# EAGLE board tx (EAGLE 9.6.2)
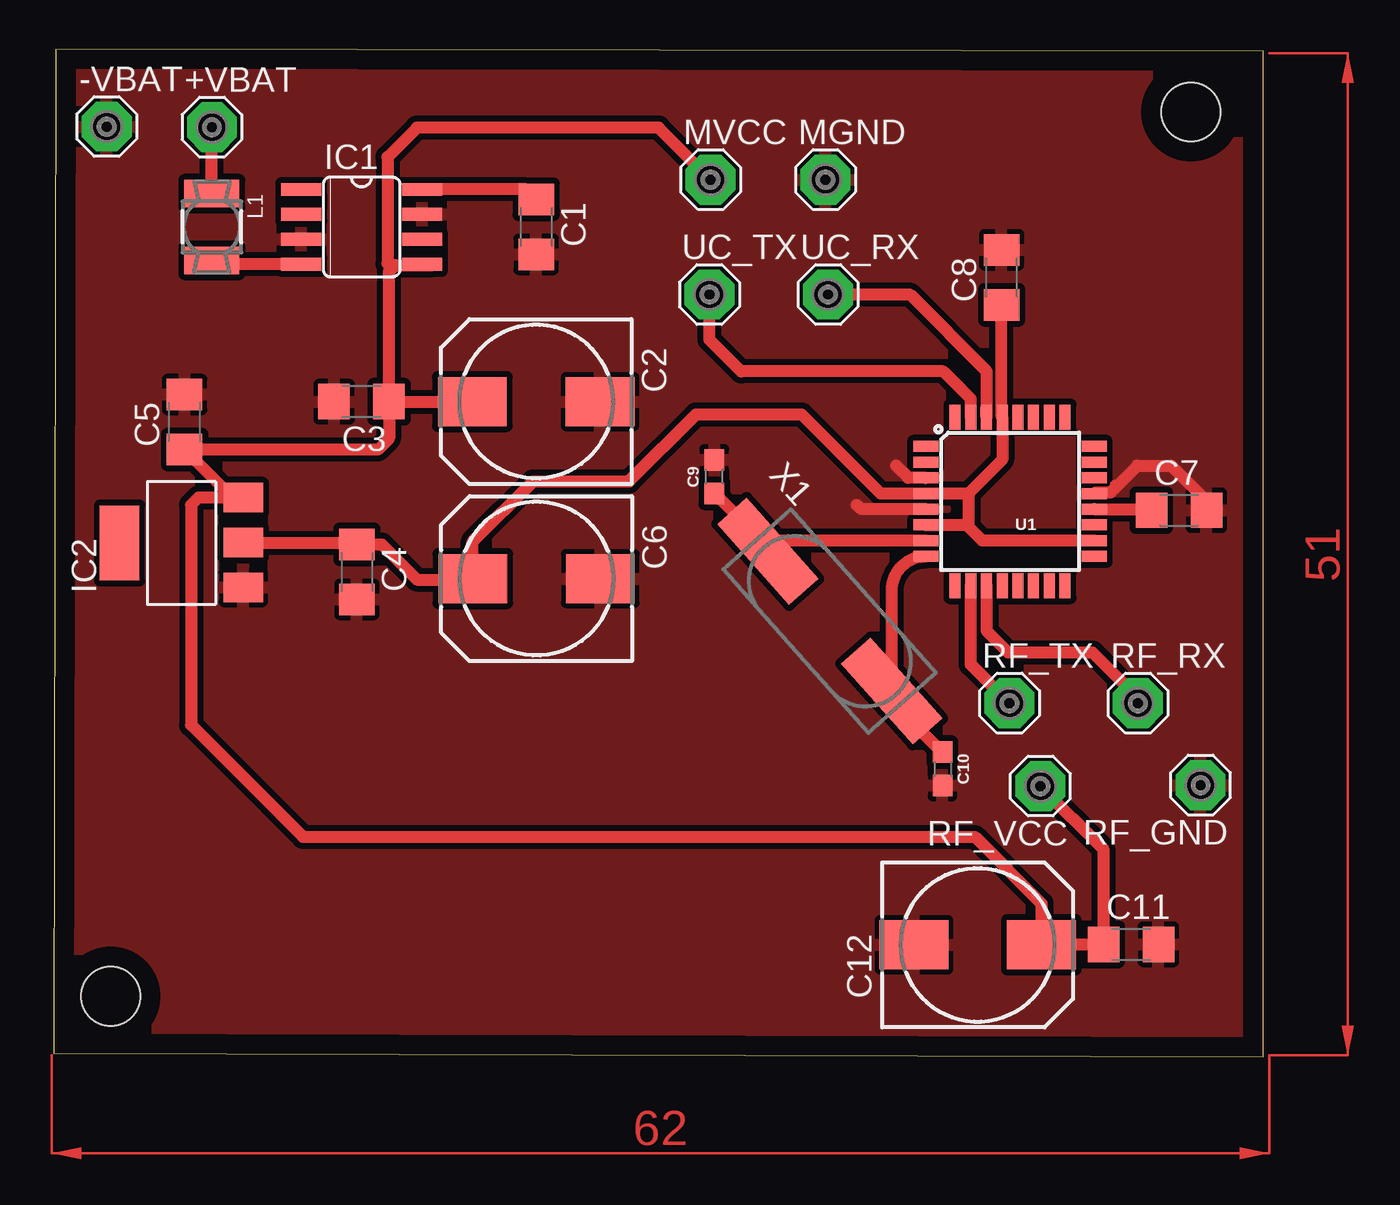
[diagram p0: board, top side]

Size 61.6 x 51.3 mm. Coordinates in mm from the lower left corner, seen from the top.
Outline: 0,0.2 61.6,0 61.6,51.2 0.1,51.3 0,0.2
Copper layers (1*16): Top 0.035mm / dielectric 1.5mm / Bottom 0.035mm
Design rules "default": minimum track width 6mil, minimum drill 0.35mm, track to track 6mil, track to pad 6mil, pad to pad 6mil, via to via 6mil, smd to smd 6mil, copper to edge 40mil, drill to drill 6mil, minimum pad ring 10mil, minimum via ring 8mil, stop-mask expansion 4mil, vias tented up to drill 0mil, thermal gap 10mil
Holes 3 mm at 2.9,3.1 57.9,48.1

## Footprints (pad centres in the part's own frame; a part is rotated, then mirrored left to right if it is on the bottom)
SE14 = drill 1.397 pad 2.54 octagon: MP 0,0
C1206 = smd 1.6 x 1.8: 1 -1.4,0; 2 1.4,0
140CLH-0810 = smd 3.5 x 2.5: + 3.25,0; - -3.25,0
0603 = smd 1.1 x 1: 1 -0.85,0; 2 0.85,0
SO08 = smd 0.66 x 2.032: 1 -1.905,-3.073; 2 -0.635,-3.073; 3 0.635,-3.073; 4 1.905,-3.073; 5 1.905,3.073; 6 0.635,3.073; 7 -0.635,3.073; 8 -1.905,3.073
SOT223 = smd 1.499 x 2.007: 1 -2.261,-3.15; 2 0.025,-3.15; 3 2.311,-3.15 | smd 3.81 x 2.007: 4 0,3.15
MS50 = smd 2.8 x 1.4: 1 0,-1.7; 2 0,1.7
TQFP32-08 = smd 1.27 x 0.559: 1 -4.293,2.8; 2 -4.293,2; 3 -4.293,1.2; 4 -4.293,0.4; 5 -4.293,-0.4; 6 -4.293,-1.2; 7 -4.293,-2; 8 -4.293,-2.8; 17 4.293,-2.8; 18 4.293,-2; 19 4.293,-1.2; 20 4.293,-0.4; 21 4.293,0.4; 22 4.293,1.2; 23 4.293,2; 24 4.293,2.8 | smd 0.559 x 1.27: 9 -2.8,-4.293; 10 -2,-4.293; 11 -1.2,-4.293; 12 -0.4,-4.293; 13 0.4,-4.293; 14 1.2,-4.293; 15 2,-4.293; 16 2.8,-4.293; 25 2.8,4.293; 26 2,4.293; 27 1.2,4.293; 28 0.4,4.293; 29 -0.4,4.293; 30 -1.2,4.293; 31 -2,4.293; 32 -2.8,4.293
CSM-7X-DU = smd 5.5 x 2: 1 -4.75,0; 2 4.75,0

## Placement (x,y rotation side)
+VBAT  SE14  [SE14]  8.06,47.33 0 top
-VBAT  SE14  [SE14]  2.7,47.36 0 top
C1  100nF  [C1206]  24.57,42.25 270 top
C2  100uF  [140CLH-0810]  24.57,33.36 180 top
C3  100nF  [C1206]  15.68,33.36 180 top
C4  100nF  [C1206]  15.44,24.69 270 top
C5  100nF  [C1206]  6.67,32.32 90 top
C6  100uF  [140CLH-0810]  24.59,24.35 180 top
C7  100nF  [C1206]  57.3,27.83 0 top
C8  100nF  [C1206]  48.27,39.68 90 top
C9  22pF  [0603]  33.64,29.54 90 top
C10  22pF  [0603]  45.26,14.67 270 top
C11  100nF  [C1206]  54.86,5.73 0 top
C12  100uF  [140CLH-0810]  47.05,5.71 0 top
IC1  MAX641CSA  [SO08]  15.68,42.25 270 top
IC2  REG1117  [SOT223]  6.51,26.16 90 top
L1  250uH  [MS50]  8.06,42.25 180 top
MGND  SE14  [SE14]  39.3,44.66 0 top
MVCC  SE14  [SE14]  33.45,44.66 0 top
RF_GND  SE14  [SE14]  58.4,13.84 180 top
RF_RX  SE14  [SE14]  55.21,18.01 0 top
RF_TX  SE14  [SE14]  48.67,18.01 0 top
RF_VCC  SE14  [SE14]  50.25,13.79 180 top
U1  ATMEGA328P_TQFP  [TQFP32-08]  48.7,28.28 0 top
UC_RX  SE14  [SE14]  39.43,38.81 0 top
UC_TX  SE14  [SE14]  33.39,38.81 0 top
X1  8MHz  [CSM-7X-DU]  39.52,22.18 311.6 top

## Library data of the parts
+VBAT -VBAT MGND MVCC RF_GND RF_RX RF_TX RF_VCC UC_RX UC_TX = solpad
C1-C8 C11 C12 = rcl; SPICEPREFIX: C
C9 C10 = SparkFun-Capacitors; PROD_ID: CAP-07876
IC1 = maxim; OC_FARNELL: unknown; OC_NEWARK: unknown
IC2 = burr-brown; MPN: REG1117; OC_FARNELL: 1097566; OC_NEWARK: 14P6981
L1 = inductor-neosid; OC_FARNELL: unknown; OC_NEWARK: unknown
U1 = SparkFun-IC-Microcontroller; PROD_ID: IC-09069
X1 = crystal; OC_FARNELL: unknown; OC_NEWARK: unknown

## Nets
+3.3V: C4.1 C6.+ C8.1 IC2.2 U1.4 U1.6 U1.18 U1.29
+5V: C2.+ C3.1 C5.1 C11.1 C12.+ IC1.5 IC2.3 MVCC.MP RF_VCC.MP
GND: -VBAT.MP C1.2 C2.- C3.2 C4.2 C5.2 C6.- C7.2 C8.2 C9.2 C10.2 C11.2 C12.- IC1.3 IC1.7 IC2.1 MGND.MP RF_GND.MP U1.3 U1.5 U1.21
N$1: IC1.4 L1.2
N$2: C1.1 IC1.8
N$3: C7.1 U1.20
N$4: +VBAT.MP L1.1
N$5: RF_RX.MP U1.11
N$6: C9.1 U1.7 X1.1
N$7: C10.1 U1.8 X1.2
N$8: RF_TX.MP U1.10
N$9: U1.30 UC_RX.MP
N$10: U1.31 UC_TX.MP

## Tracks (layer width: path | path; a pad name or v marks a point on that pad's centre or on a via)
+3.3V
  Top 0.61: C8.1 48.27,32.6 U1.29 48.3,30.4 46.58,28.68 | 46.58,28.68 U1.4 42.12,28.68 38.1,32.7 32.7,32.7 29.3,29.3 24.4,29.3 21.34,26.24 C6.+ 21.29,24.3 18.5,24.3 16.71,26.09 C4.1 15.35,26.19 IC2.2 | U1.6 46.48,27.08 | 46.48,27.08 46.6,27.2 46.6,28.66 46.58,28.68 | U1.18 47.28,26.28 46.48,27.08
+5V
  Top 0.61: C3.1 17.08,39.98 17.25,40.15 | 17.25,40.15 17.4,40.3 18.71,40.3 | 18.71,40.3 19.3,40.3 | IC1.5 18.71,40.3 | C3.1 C2.+ | C3.1 17.08,31.48 16.52,30.92 C5.1 9.12,28.47 IC2.3 7.37,28.47 7,28.1 7,16.9 12.7,11.2 46.9,11.2 50.3,7.8 C12.+ 53.44,5.71 | C11.1 53.44,5.71 | RF_VCC.MP 53.44,10.6 53.44,5.71 | MVCC.MP 30.81,47.3 18.5,47.3 17,45.8 17,40.4 17.25,40.15
GND
  Top 0.61: U1.3 43.52,29.48 42.9,30.1 | U1.5 41.12,27.88 40.9,28.1 | U1.21 53.06,28.74 53.82,28.74 54.09,29.01 | 54.09,29.01 54.09,29.1 | 54.09,29.01 55.17,30.1 56.9,30.1 58.7,28.3 C7.2
  pour Top (isolate 0.3): -0.1,51.1 -0.1,0.1 61.9,0.1 61.9,51.1
N$1
  Top 0.61: IC1.4 8.27,40.34 L1.2
N$2
  Top 0.61: IC1.8 24.04,44.16 24.55,43.65 C1.1
N$3
  Top 0.61: U1.20 55.85,27.88 C7.1
N$4
  Top 0.61: L1.1 +VBAT.MP
N$5
  Top 0.61: U1.11 47.5,21.7 48.6,20.6 52.9,20.6 55.21,18.29 RF_RX.MP
N$6
  Top 0.61: U1.7 36.91,26.28 X1.1 36.37,25.96 C9.1
N$7
  Top 0.61: U1.8 arc90 42.67,23.75 42.67,18.8 X1.2 42.67,18.11 C10.1
N$8
  Top 0.61: RF_TX.MP 46.7,19.98 U1.10
N$9
  Top 0.61: 47.5,33.1 U1.30 47.5,34.9 43.59,38.81 UC_RX.MP
N$10
  Top 0.61: U1.31 46.7,33.5 45.3,34.9 35,34.9 33.39,36.51 UC_TX.MP
(copper drawn outside any net)
  shapes: Top area x2